# Altium PCB BackPlane4.PcbDoc
Units mm, origin at the board's own origin, x right, y up, seen from the top; angles counter-clockwise.
Board outline 120 x 130 mm, 4 copper layers (Top Layer, Internal Plane 1, Mid-Layer 1, Bottom Layer); 68 components, 80 nets, 548 pads, 0 vias.
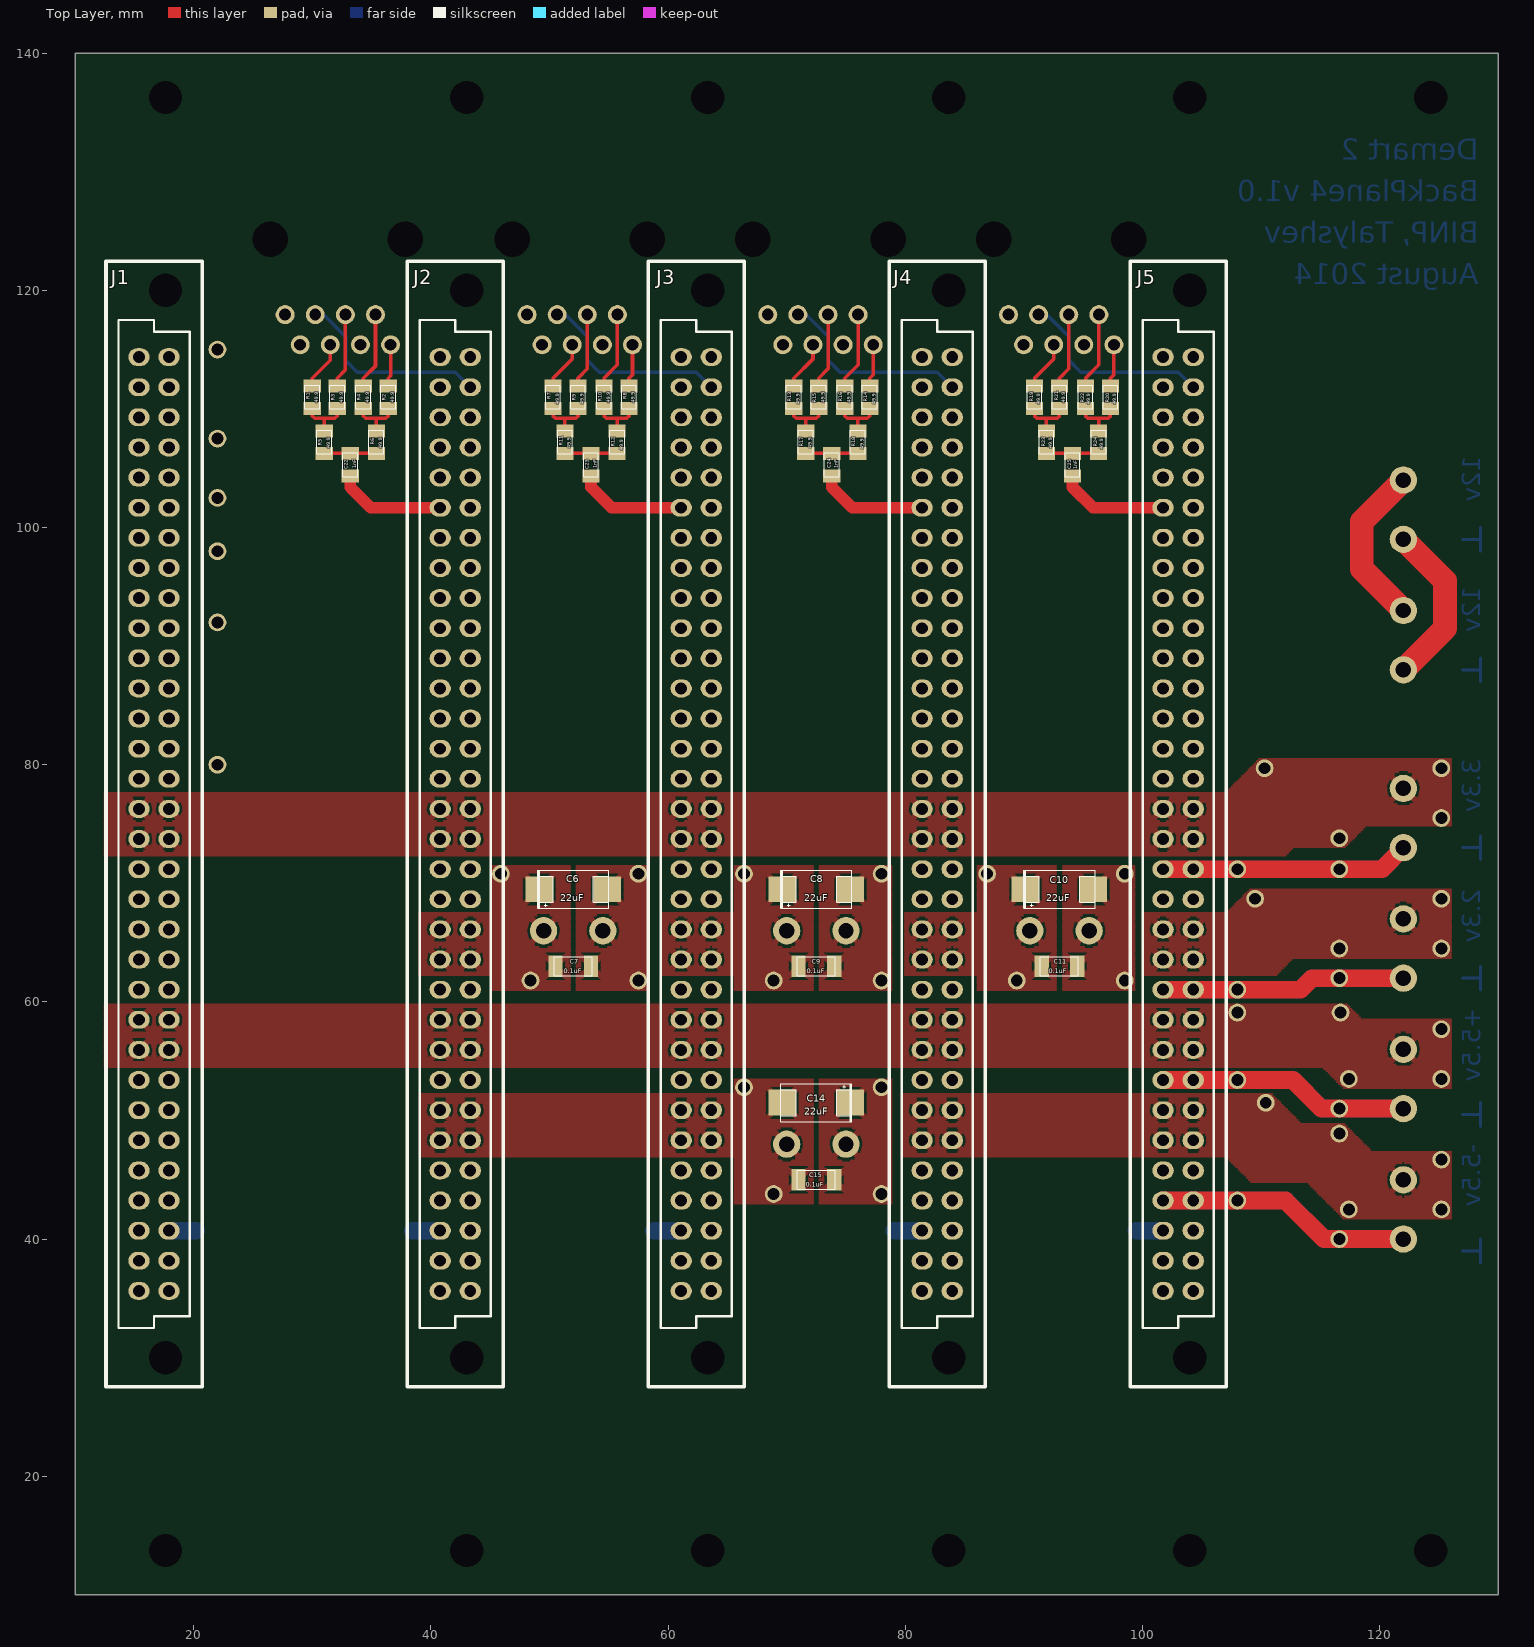
[diagram p0: Top Layer view]
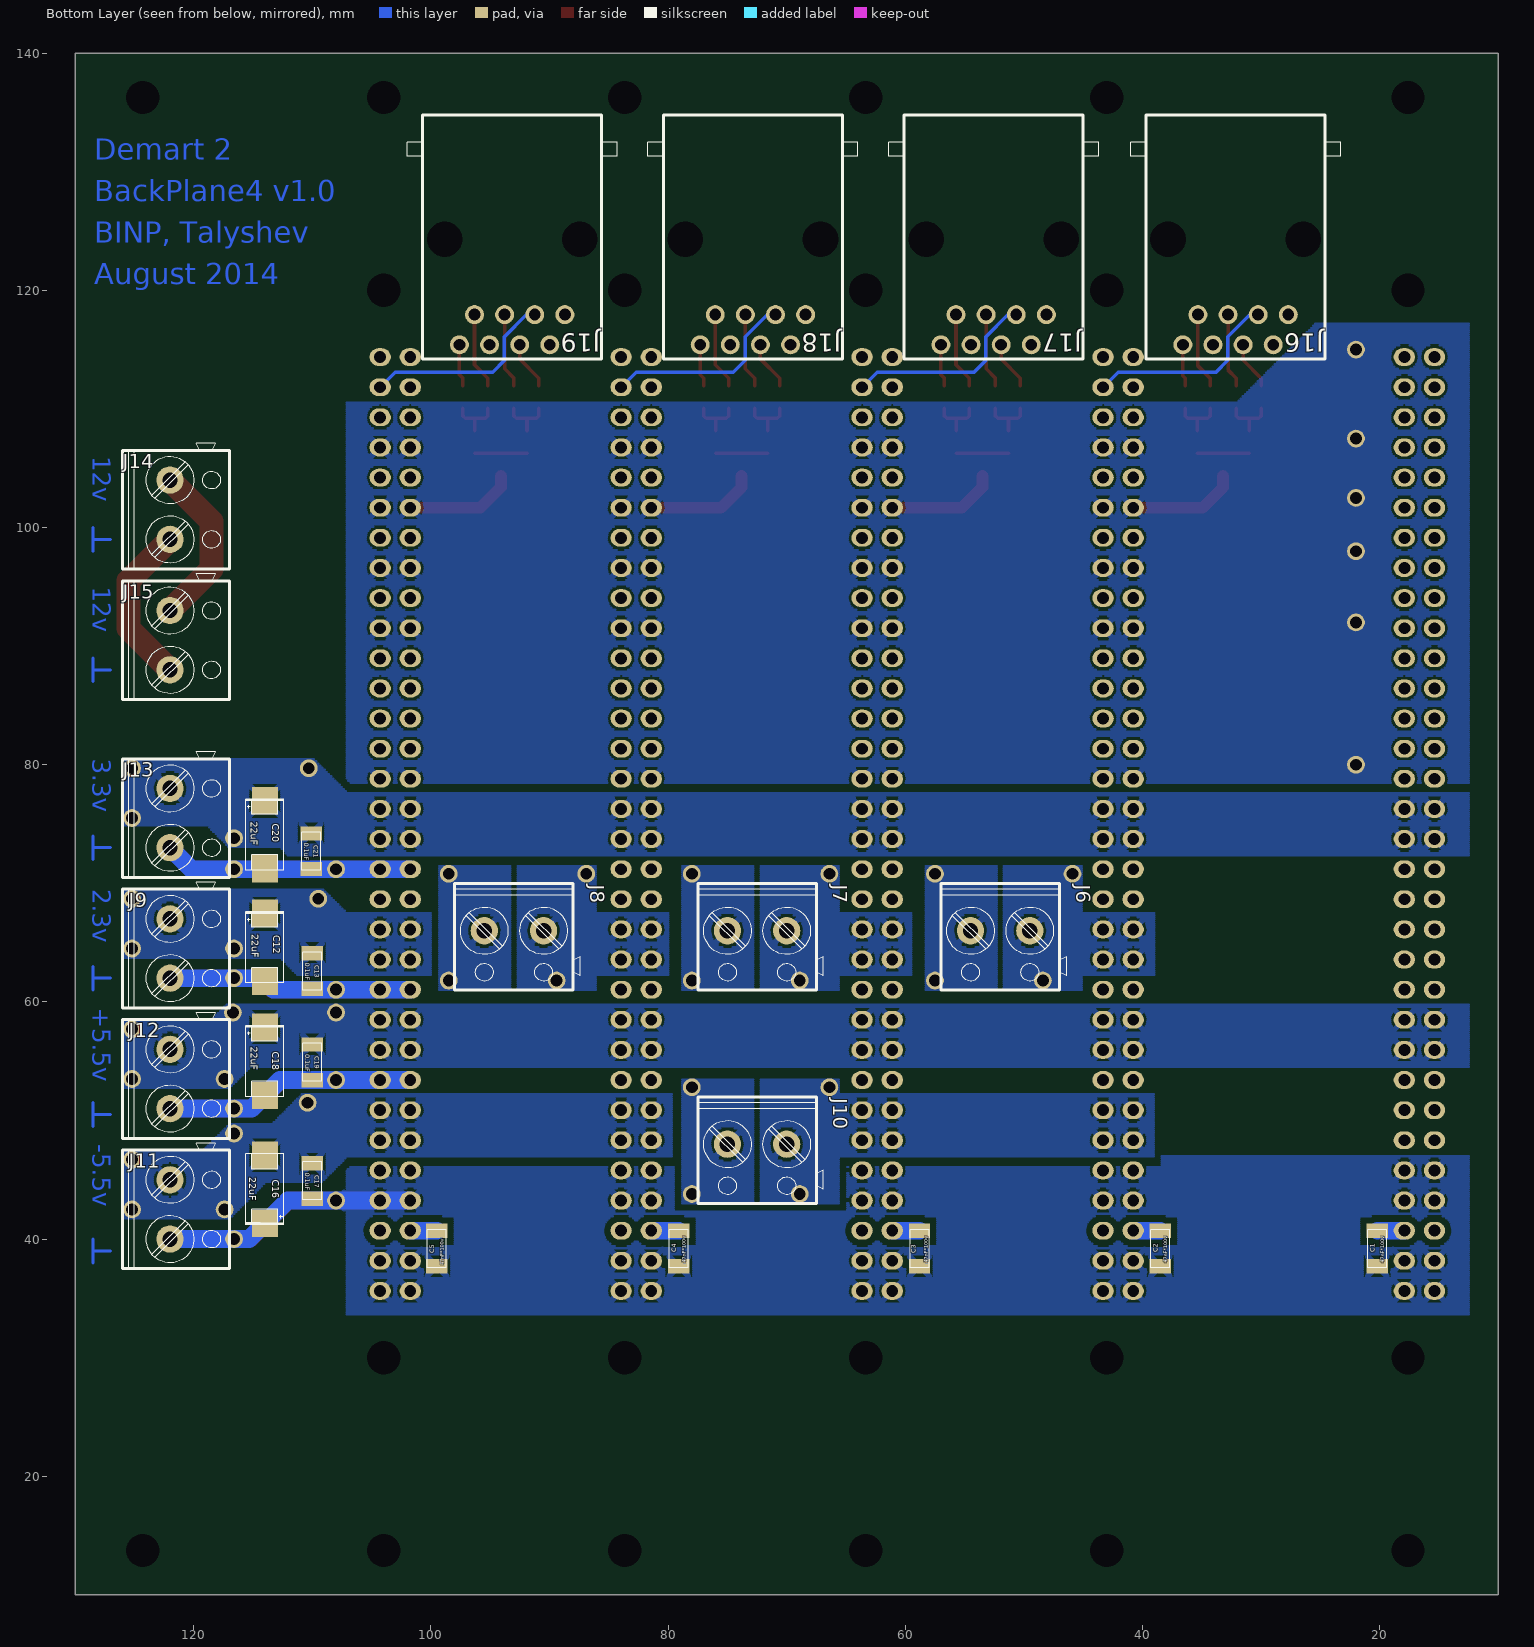
[diagram p1: Bottom Layer view, seen from below]
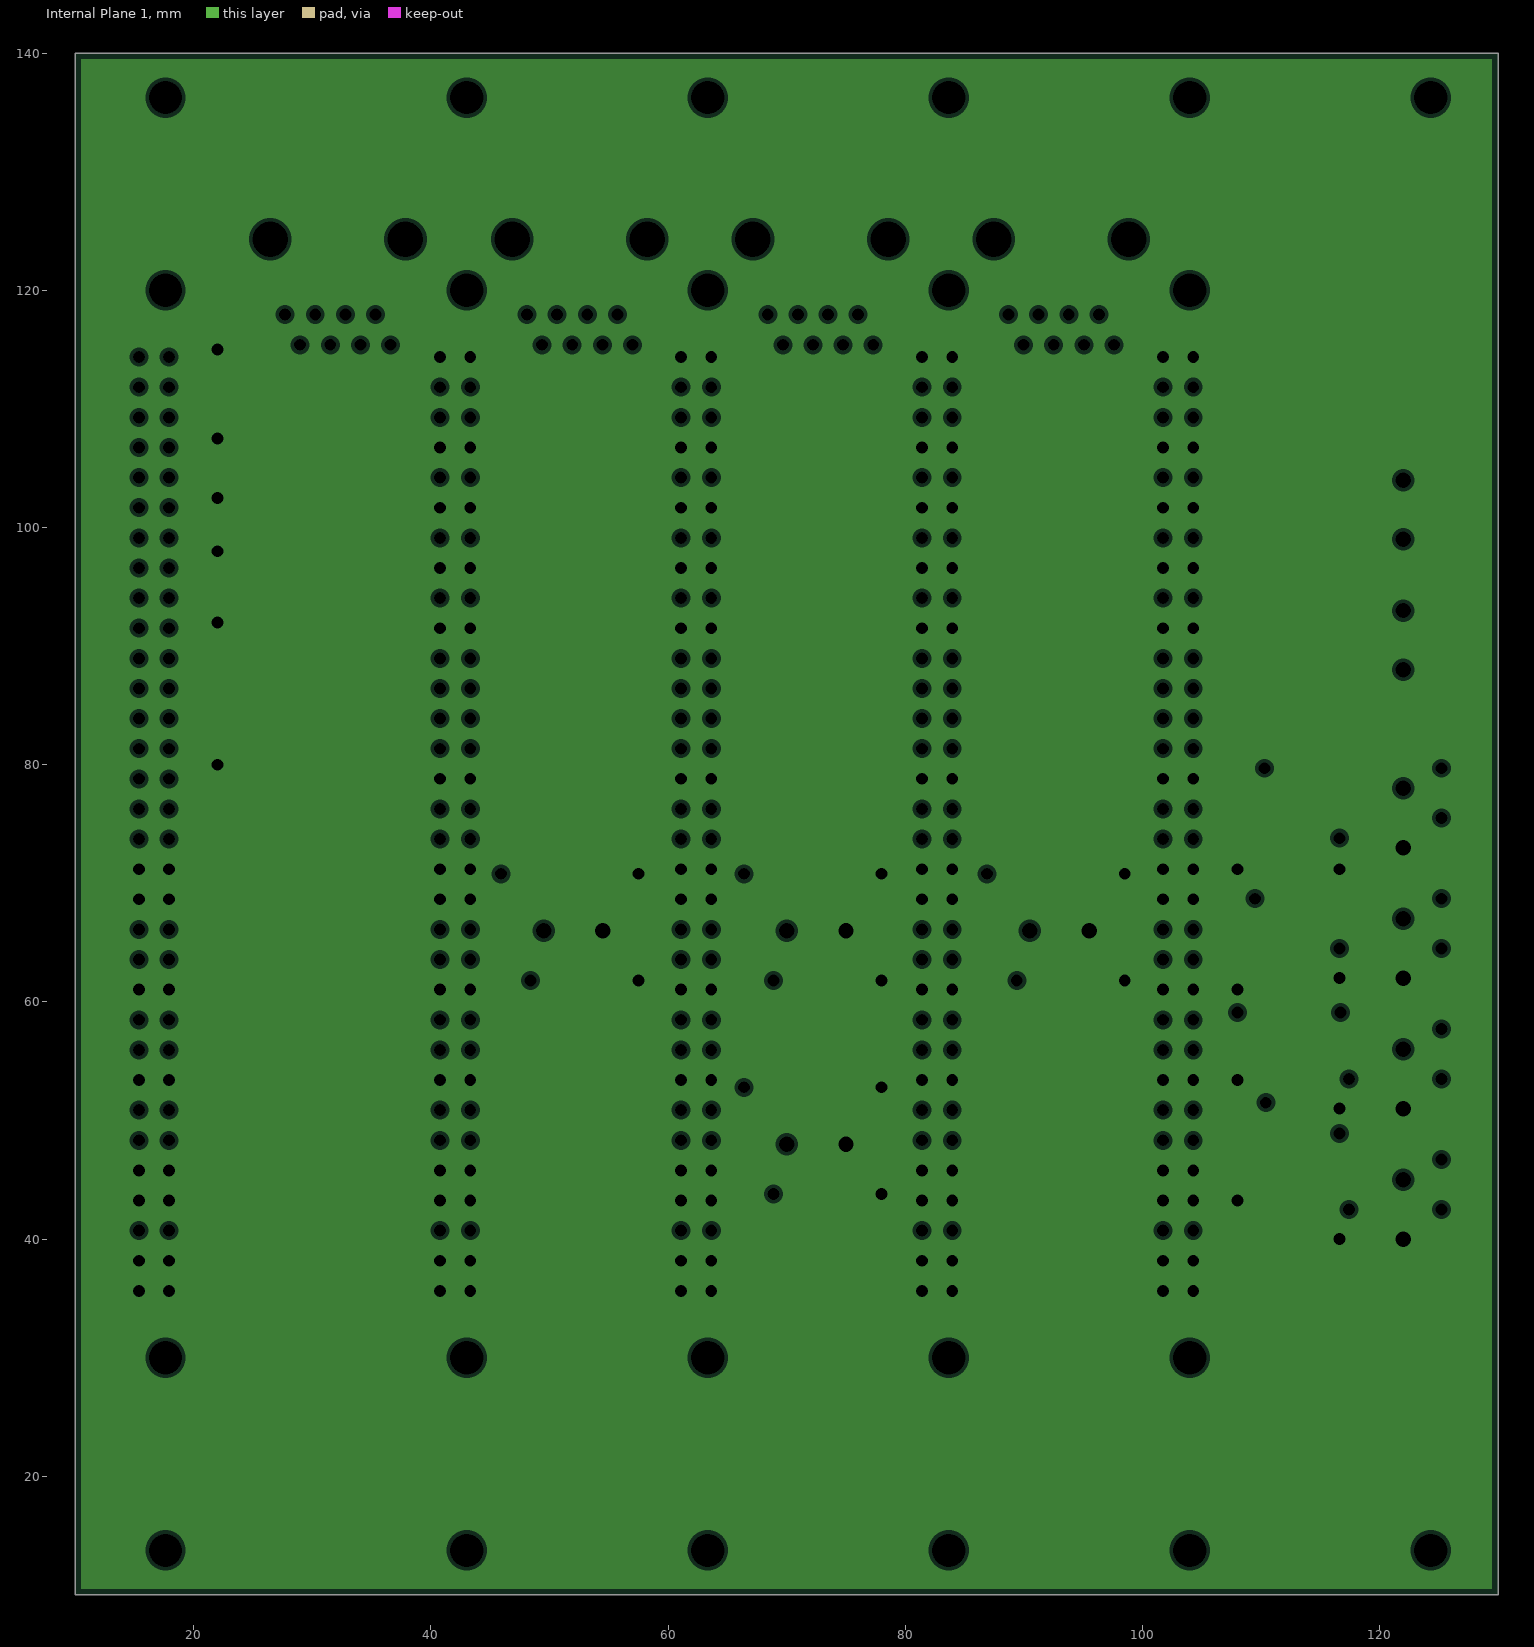
[diagram p2: Internal Plane 1, clearances drawn from the general rule]
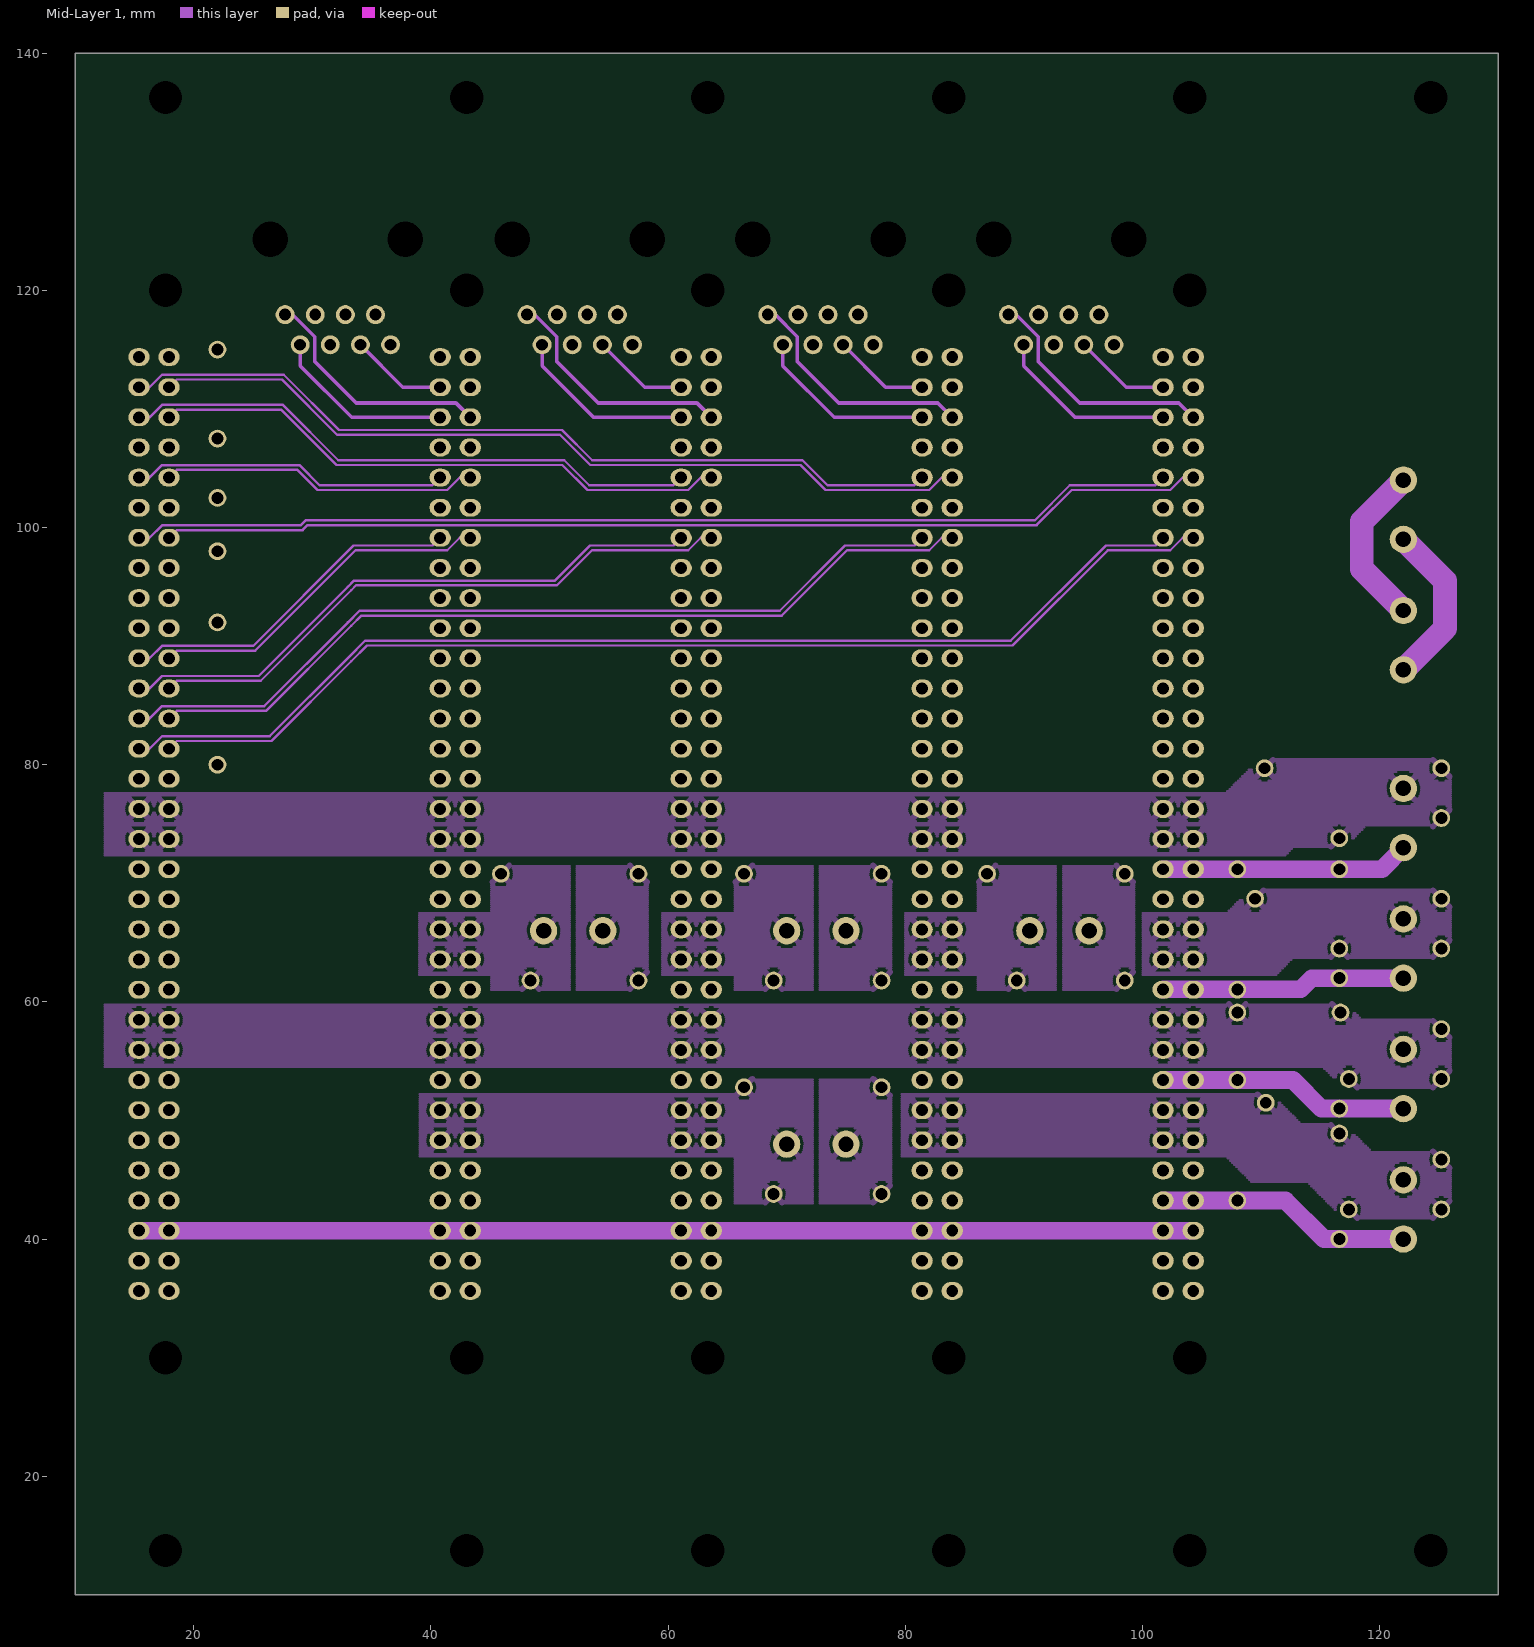
[diagram p3: Mid-Layer 1]

## Layer stack, top to bottom
Top Layer: signal copper 0.0356
Dielectric: core 0.32, FR-4, Dk 4.8
Internal Plane 1: plane copper 0.0356, net GND
Dielectric: prepreg 0.32, FR-4, Dk 4.8
Mid-Layer 1: signal copper 0.0356
Dielectric: core 0.32, FR-4, Dk 4.8
Bottom Layer: signal copper 0.0356

## Board outline
10,10 10,140 130,140 130,10 10,10

## Design rules (kind name [scope] priority, off if disabled: settings)
Clearance Clearance_HV [All vs (InNet('HV'))] p1: gap=0.5
Clearance Clearance_mid6_poly [(InPolygon AND OnLayer('Mid-Layer 6')) vs (OnLayer('Mid-Layer 6') OR OnLayer('Multi-Layer'))] p2: gap=0.25
Clearance Clearance_mid5_poly [(InPolygon AND OnLayer('Mid-Layer 5')) vs (OnLayer('Mid-Layer 5') OR OnLayer('Multi-Layer'))] p3: gap=0.25
Clearance Clearance_mid4_poly [(InPolygon AND OnLayer('Mid-Layer 4')) vs (OnLayer('Mid-Layer 4') OR OnLayer('Multi-Layer'))] p4: gap=0.25
Clearance Clearance_mid3_poly [(InPolygon AND OnLayer('Mid-Layer 3')) vs (OnLayer('Mid-Layer 3') OR OnLayer('Multi-Layer'))] p5: gap=0.25
Clearance Clearance_mid2_poly [(InPolygon AND OnLayer('Mid-Layer 2')) vs (OnLayer('Mid-Layer 2') OR OnLayer('Multi-Layer'))] p6: gap=0.25
Clearance Clearance_mid1_poly [(InPolygon AND OnLayer('Mid-Layer 1')) vs (OnLayer('Mid-Layer 1') OR OnLayer('Multi-Layer'))] p7: gap=0.25
Clearance Clearance_in2 [OnLayer('Internal Plane 2') vs (OnLayer('Internal Plane 2') OR OnLayer('Multi-Layer'))] p8: gap=0.2
Clearance Clearance_mid6 [OnLayer('Mid-Layer 6') vs (OnLayer('Mid-Layer 6') OR OnLayer('Multi-Layer'))] p9: gap=0.15
Clearance Clearance_mid5 [OnLayer('Mid-Layer 5') vs (OnLayer('Mid-Layer 5') OR OnLayer('Multi-Layer'))] p10: gap=0.15
Clearance Clearance_mid4 [OnLayer('Mid-Layer 4') vs (OnLayer('Mid-Layer 4') OR OnLayer('Multi-Layer'))] p11: gap=0.15
Clearance Clearance_bottom_poly [(InPolygon AND OnLayer('Bottom Layer')) vs (OnLayer('Bottom Layer') OR OnLayer('Multi-Layer'))] p12: gap=0.2
Clearance Clearance_top_poly [(InPolygon AND OnLayer('Top Layer')) vs (OnLayer('Top Layer') OR OnLayer('Multi-Layer'))] p13: gap=0.2
Clearance Clearance_int1 [OnLayer('Internal Plane 1') vs (OnLayer('Internal Plane 1') OR OnLayer('Multi-Layer'))] p14: gap=0.2
Clearance Clearance_bot [OnLayer('Bottom Layer') vs (OnLayer('Bottom Layer') OR OnLayer('Multi-Layer'))] p15: gap=0.15
Clearance Clearance_mid3 [OnLayer('Mid-Layer 3') vs (OnLayer('Mid-Layer 3') OR OnLayer('Multi-Layer'))] p16: gap=0.15
Clearance Clearance_mid2 [OnLayer('Mid-Layer 2') vs (OnLayer('Mid-Layer 2') OR OnLayer('Multi-Layer'))] p17: gap=0.15
Clearance Clearance_mid1 [OnLayer('Mid-Layer 1') vs (OnLayer('Mid-Layer 1') OR OnLayer('Multi-Layer'))] p18: gap=0.15
Clearance Clearance_top [OnLayer('Top Layer') vs (OnLayer('Top Layer') OR OnLayer('Multi-Layer'))] p19: gap=0.15
DiffPairsRouting [All] p1: maxlimit=0.2 minlimit=0.2 mostfreqgap=0.2 maxuncoupledlength=12.7
HoleSize [All] p1: absolutevalues=TRUE maxlimit=4 minlimit=0.025 maxpercent=80.000 minpercent=20.000
MinimumSolderMaskSliver [All] p1: minsoldermaskwidth=0.178
PlaneClearance [All] p1: clearance=0.3
PlaneConnect [All] p1: planeconnectstyle=Relief reliefexpansion=0.3 reliefentries=4 reliefconductorwidth=0.5 reliefairgap=0.3
PolygonConnect [All] p1: connectstyle=Relief reliefconductorwidth=0.5 reliefentries=4 polygonreliefangle="45 Angle"
RoomDefinition BackPlane4 [InComponentClass('BackPlane4')] p1: confinementstyle=ConfineOut formatcopy=TRUE lockcomponents=FALSE outline 132.5,10 182.5,10 182.5,22.5 132.5,22.5
RoutingVias [All] p1: holewidth=0.3 width=0.6 viastyle="Through Hole" minholewidth=0.25 minwidth=0.5 maxholewidth=4 maxwidth=6
SilkToSilkClearance [All] p1: silktosilkclearance=0.025
SilkscreenOverComponentPads [All] p1: minsilkscreentomaskgap=0.102
SolderMaskExpansion [All] p1: expansion=0.075
Width [All] p1: maxlimit=10 minlimit=0.15 preferedwidth=0.2
21 further rules are at their usual default settings.

## Classes and differential pairs
net class "HV Class": HV
differential pair HIT0: +HIT0_P -HIT0_N
differential pair HIT1: +HIT1_P -HIT1_N
differential pair HIT2: +HIT2_P -HIT2_N
differential pair HIT3: +HIT3_P -HIT3_N
differential pair STROBE0: +STROBE0_P -STROBE0_N
differential pair STROBE1: +STROBE1_P -STROBE1_N
differential pair STROBE2: +STROBE2_P -STROBE2_N
differential pair STROBE3: +STROBE3_P -STROBE3_N

## Components (designator, comment, footprint, x,y, rotation, side; value= is the part's Value field where it differs from the comment)
C1 "47nF*100v" 1206 20.2,39.2 r90 bottom
C2 "47nF*100v" 1206 38.5,39.2 r90 bottom
C3 "47nF*100v" 1206 58.8,39.2 r90 bottom
C4 "47nF*100v" 1206 79.1,39.2 r90 bottom
C5 "47nF*100v" 1206 99.5,39.2 r90 bottom
C6 "22uF" CP6032 52,69.5 r0 top
C7 "0.1uF" 1206 52,63 r180 top
C8 "22uF" CP6032 72.5,69.5 r0 top
C9 "0.1uF" 1206 72.5,63 r180 top
C10 "22uF" CP6032 93,69.5 r0 top
C11 "0.1uF" 1206 93,63 r180 top
C12 "22uF" CP6032 114,64.6 r270 bottom
C13 "0.1uF" 1206 110,62.6 r90 bottom
C14 "22uF" CP6032 72.5,51.5 r180 top
C15 "0.1uF" 1206 72.5,45 r180 top
C16 "22uF" CP6032 114,44.2 r90 bottom
C17 "0.1uF" 1206 110,44.9 r90 bottom
C18 "22uF" CP6032 114,55 r270 bottom
C19 "0.1uF" 1206 110,54.9 r90 bottom
C20 "22uF" CP6032 114,74.1 r270 bottom
C21 "0.1uF" 1206 110.1,72.7 r90 bottom
C22 "1nF" 0805 33.2,105.3 r90 top
C23 "1nF" 0805 53.5,105.3 r90 top
C24 "1nF" 0805 73.8,105.3 r90 top
C25 "1nF" 0805 94.1,105.3 r90 top
J1 "DIN41612-B-F" DIN41612-B-F 15.38,114.37 r0 top
J2 "DIN41612-B-F" DIN41612-B-F 40.78,114.37 r0 top
J3 "DIN41612-B-F" DIN41612-B-F 61.1,114.37 r0 top
J4 "DIN41612-B-F" DIN41612-B-F 81.42,114.37 r0 top
J5 "DIN41612-B-F" DIN41612-B-F 101.74,114.37 r0 top
J6 "DG300-5-02" DG300-5-02 49.5,66 r270 bottom
J7 "DG300-5-02" DG300-5-02 70,66 r270 bottom
J8 "DG300-5-02" DG300-5-02 90.5,66 r270 bottom
J9 "DG300-5-02" DG300-5-02 122,67 r180 bottom
J10 "DG300-5-02" DG300-5-02 70,48 r270 bottom
J11 "DG300-5-02" DG300-5-02 122,45 r180 bottom
J12 "DG300-5-02" DG300-5-02 122,56 r180 bottom
J13 "DG300-5-02" DG300-5-02 122,78 r180 bottom
J14 "DG300-5-02" DG300-5-02 122,104 r180 bottom
J15 "DG300-5-02" DG300-5-02 122,93 r180 bottom
J16 "Ethernet" TJ2-8P8C 24.6,134.8 r0 bottom
J17 "Ethernet" TJ2-8P8C 45,134.8 r0 bottom
J18 "Ethernet" TJ2-8P8C 65.3,134.8 r0 bottom
J19 "Ethernet" TJ2-8P8C 85.6,134.8 r0 bottom
R1 "49.9" 0805 30,111 r270 top
R2 "49.9" 0805 36.4,111 r270 top
R3 "49.9" 0805 32.1,111 r270 top
R4 "49.9" 0805 34.3,111 r270 top
R5 "49.9" 0805 31,107.2 r270 top
R6 "49.9" 0805 35.4,107.2 r270 top
R7 "49.9" 0805 50.3,111 r270 top
R8 "49.9" 0805 56.7,111 r270 top
R9 "49.9" 0805 52.4,111 r270 top
R10 "49.9" 0805 54.6,111 r270 top
R11 "49.9" 0805 51.3,107.2 r270 top
R12 "49.9" 0805 55.7,107.2 r270 top
R13 "49.9" 0805 70.6,111 r270 top
R14 "49.9" 0805 77,111 r270 top
R15 "49.9" 0805 72.7,111 r270 top
R16 "49.9" 0805 74.9,111 r270 top
R17 "49.9" 0805 71.6,107.2 r270 top
R18 "49.9" 0805 76,107.2 r270 top
R19 "49.9" 0805 90.9,111 r270 top
R20 "49.9" 0805 97.3,111 r270 top
R21 "49.9" 0805 93,111 r270 top
R22 "49.9" 0805 95.2,111 r270 top
R23 "49.9" 0805 91.9,107.2 r270 top
R24 "49.9" 0805 96.3,107.2 r270 top

## Footprints (in the part's own frame and the unit in brackets; to place one, negate y for a bottom-side part, rotate by r counter-clockwise, add the part's x,y. Pads: shape width x height; smd on the part's side, far side on the other; paste and mask are expansions set on the pad)
0805 [mm]
  rect 1.1x1.45 smd: 1(-0.95,0) 2(0.95,0)
  silkscreen extent -1,-0.63 1,0.63, body extent -1,-0.62 1,0.62, height 0.5
1206 [mm]
  rect 1.2x1.8 smd: 1(-1.5,0) 2(1.5,0)
  silkscreen extent -1.6,-0.8 1.6,0.8, body extent -1.6,-0.8 1.6,0.8, height 0.6
CP6032 [mil]
  rect 91x86 smd: +(-113,0) -(113,0)
  silkscreen extent -118,-63 118,63, body extent -119,-64 119,64, height 100
DG300-5-02 [mm] "5 mm gap clip"
  round 2.3 hole 1.3: 1(0,0) 2(0,-5)
  silkscreen extent -4,-7.5 5,3.1, body extent -4,-7.5 5,2.5, height 12.5
DIN41612-B-F [mm]
  round 0 hole 2.8: 0(2.24,5.63) 1(2.24,-84.37)
  oval 1.8x1.5 hole 1: A1(0,0) A2(0,-2.54) A3(0,-5.08) A4(0,-7.62) A5(0,-10.16) A6(0,-12.7) A7(0,-15.24) A8(0,-17.78) A9(0,-20.32) A10(0,-22.86) A11(0,-25.4) A12(0,-27.94) A13(0,-30.48) A14(0,-33.02) A15(0,-35.56) A16(0,-38.1) A17(0,-40.64) A18(0,-43.18) A19(0,-45.72) A20(0,-48.26) A21(0,-50.8) A22(0,-53.34) A23(0,-55.88) A24(0,-58.42) A25(0,-60.96) A26(0,-63.5) A27(0,-66.04) A28(0,-68.58) A29(0,-71.12) A30(0,-73.66) A31(0,-76.2) A32(0,-78.74) B1(2.54,0) B2(2.54,-2.54) B3(2.54,-5.08) B4(2.54,-7.62) B5(2.54,-10.16) B6(2.54,-12.7) B7(2.54,-15.24) B8(2.54,-17.78) B9(2.54,-20.32) B10(2.54,-22.86) B11(2.54,-25.4) B12(2.54,-27.94) B13(2.54,-30.48) B14(2.54,-33.02) B15(2.54,-35.56) B16(2.54,-38.1) B17(2.54,-40.64) B18(2.54,-43.18) B19(2.54,-45.72) B20(2.54,-48.26) B21(2.54,-50.8) B22(2.54,-53.34) B23(2.54,-55.88) B24(2.54,-58.42) B25(2.54,-60.96) B26(2.54,-63.5) B27(2.54,-66.04) B28(2.54,-68.58) B29(2.54,-71.12) B30(2.54,-73.66) B31(2.54,-76.2) B32(2.54,-78.74)
  silkscreen extent -2.78,-86.82 5.32,8.08, body extent -2.78,-86.82 5.32,8.08, height 11.6
TJ2-8P8C [mm]
  round 0 hole 3: 0(1.85,10.5) 0(13.25,10.5)
  round 1.6 hole 1: 1(3.105,16.85) 2(4.375,19.39) 3(5.645,16.85) 4(6.915,19.39) 5(8.185,16.85) 6(9.455,19.39) 7(10.725,16.85) 8(11.995,19.39)
  silkscreen extent -1.3,0 16.4,20.6, body extent 0,0 15.1,20.6, height 16

## Part data
C1 C2 C3 C4 C5 C7 C9 C11 C13 C15 C17 C19 C21: library part C
C6 C8 C10 C12 C14 C16 C18 C20: library part "C POL"
C22 C23 C24 C25: library part Cap, "Capacitor"
J16 J17 J18 J19: library part RJ-45, "Connector"
R1 R2 R3 R4 R5 R6 R7 R8 R9 R10 R11 R12 R13 R14 R15 R16 R17 R18 R19 R20 R21 R22 R23 R24: library part Res2, "Resistor"

## Free pads (board coordinates)
  round 0 hole 2.8: 0(17.62,13.75) 0(17.62,136.25) 1(43.02,13.75) 1(43.02,136.25) 2(63.34,13.75) 2(63.34,136.25) 3(83.66,13.75) 3(83.66,136.25) 4(103.98,13.75) 4(103.98,136.25) 4(124.3,13.75) 4(124.3,136.25)
  round 1.5 hole 1: 0(57.5,61.8) 0(57.5,70.8) 0(78,43.8) 0(78,52.8) 0(78,61.8) 0(78,70.8) 0(98.5,61.8) 0(98.5,70.8) 0(108,43.25) 0(108,53.41) 0(108,61.03) 0(108,71.19) 0(108,59.1) 0(109.5,68.7) 0(110.3,79.7) 0(110.4,51.5) 0(116.6,73.8) 0(116.6,40) 0(116.6,48.9) 0(116.6,51) 0(116.6,62) 0(116.6,64.5) 0(116.6,71.19) 0(116.7,59.1) 0(117.4,42.5) 0(117.4,53.5) 0(125.2,46.7) 0(125.2,68.7) 0(125.2,42.5) 0(125.2,53.5) 0(125.2,57.7) 0(125.2,64.5) 0(125.2,75.5) 0(125.2,79.7) 1(45.9,70.8) 1(66.4,52.8) 1(66.4,70.8) 1(86.9,70.8) 2(22,80) 2(22,92) 2(22,98) 2(22,102.5) 2(22,107.5) 2(22,115) 2(48.4,61.8) 2(68.9,43.8) 2(68.9,61.8) 2(89.4,61.8)

## Nets (pads, with @x,y where several pads share a name; then routed paths per layer and width w, separated by ;. In a path a pad name is that pad's centre, name@x,y a point inside that pad or via, vN(x,y) a via of type N, cw(c..) or ccw(c..) an arc to the next point about the centre after c; other vN are vias at no path point)
+2.3V1: C6.+ C7.2 J2.A20 J2.A21 J2.B20 J2.B21 J6.1 pad.1@45.9,70.8 pad.2@48.4,61.8
+2.3V2: C8.+ C9.2 J3.A20 J3.A21 J3.B20 J3.B21 J7.1 pad.1@66.4,70.8 pad.2@68.9,61.8
+2.3V3: C10.+ C11.2 J4.A20 J4.A21 J4.B20 J4.B21 J8.1 pad.1@86.9,70.8 pad.2@89.4,61.8
+2.3V4: C12.+ C13.2 J5.A20 J5.A21 J5.B20 J5.B21 J9.1 pad.0@109.5,68.7 pad.0@116.6,64.5 pad.0@125.2,64.5 pad.0@125.2,68.7
+3.3V: C20.+ C21.2 J1.A16 J1.A17 J1.B16 J1.B17 J2.A16 J2.A17 J2.B16 J2.B17 J3.A16 J3.A17 J3.B16 J3.B17 J4.A16 J4.A17 J4.B16 J4.B17 J5.A16 J5.A17 J5.B16 J5.B17 J13.1 pad.0@110.3,79.7 pad.0@116.6,73.8 pad.0@125.2,75.5 pad.0@125.2,79.7
+5.5V: C18.+ C19.2 J1.A23 J1.A24 J1.B23 J1.B24 J2.A23 J2.A24 J2.B23 J2.B24 J3.A23 J3.A24 J3.B23 J3.B24 J4.A23 J4.A24 J4.B23 J4.B24 J5.A23 J5.A24 J5.B23 J5.B24 J12.1 pad.0@108,59.1 pad.0@116.7,59.1 pad.0@117.4,53.5 pad.0@125.2,53.5 pad.0@125.2,57.7
+12V_FAN: J14.1 J15.1 | length 27.8
  Top Layer w2: J15.1 118.5,96.5 118.5,100.5 J14.1
  Mid-Layer 1 w2: J15.1 118.5,96.5 118.5,100.5 J14.1
-5.5V1: C14.- C15.2 J2.A26 J2.A27 J2.B26 J2.B27 J3.A26 J3.A27 J3.B26 J3.B27 J10.1 pad.1@66.4,52.8 pad.2@68.9,43.8
-5.5V2: C16.- C17.2 J4.A26 J4.A27 J4.B26 J4.B27 J5.A26 J5.A27 J5.B26 J5.B27 J11.1 pad.0@110.4,51.5 pad.0@116.6,48.9 pad.0@117.4,42.5 pad.0@125.2,42.5 pad.0@125.2,46.7
ETH0_1: J2.B3 J16.1 | length 20.4
  Mid-Layer 1 w0.3: J16.1 28.35,117.95 30.2,116.1 30.2,114 33.7,110.5 42.11,110.5 J2.B3
ETH0_2: J2.A3 J16.2 | length 15.4
  Mid-Layer 1 w0.3: J16.2 28.975,113.625 33.31,109.29 J2.A3
ETH0_3: J2.B2 J16.3 | length 16.8
  Bottom Layer w0.3: J16.3 30.95,117.95 32.8,116.1 32.8,114.1 33.8,113.1 42.05,113.1 J2.B2
ETH0_6: J2.A2 J16.6 | length 8.2
  Mid-Layer 1 w0.3: J16.6 37.635,111.83 J2.A2
ETH1_1: J3.B3 J17.1 | length 20.4
  Mid-Layer 1 w0.3: J17.1 48.75,117.95 50.6,116.1 50.6,114 54.1,110.5 62.43,110.5 J3.B3
ETH1_2: J3.A3 J17.2 | length 15.3
  Mid-Layer 1 w0.3: J17.2 49.375,113.625 53.71,109.29 J3.A3
ETH1_3: J3.B2 J17.3 | length 16.7
  Bottom Layer w0.3: J17.3 51.35,117.95 53.2,116.1 53.2,114.1 54.2,113.1 62.37,113.1 J3.B2
ETH1_6: J3.A2 J17.6 | length 8.1
  Mid-Layer 1 w0.3: J17.6 58.035,111.83 J3.A2
ETH2_1: J4.B3 J18.1 | length 20.4
  Mid-Layer 1 w0.3: J18.1 69.05,117.95 70.9,116.1 70.9,114 74.4,110.5 82.75,110.5 J4.B3
ETH2_2: J4.A3 J18.2 | length 15.3
  Mid-Layer 1 w0.3: J18.2 69.675,113.625 74.01,109.29 J4.A3
ETH2_3: J4.B2 J18.3 | length 16.7
  Bottom Layer w0.3: J18.3 71.65,117.95 73.5,116.1 73.5,114.1 74.5,113.1 82.69,113.1 J4.B2
ETH2_6: J4.A2 J18.6 | length 8.1
  Mid-Layer 1 w0.3: J18.6 78.335,111.83 J4.A2
ETH3_1: J5.B3 J19.1 | length 20.4
  Mid-Layer 1 w0.3: J19.1 89.35,117.95 91.2,116.1 91.2,114 94.7,110.5 103.07,110.5 J5.B3
ETH3_2: J5.A3 J19.2 | length 15.3
  Mid-Layer 1 w0.3: J19.2 89.975,113.625 94.31,109.29 J5.A3
ETH3_3: J5.B2 J19.3 | length 16.7
  Bottom Layer w0.3: J19.3 91.95,117.95 93.8,116.1 93.8,114.1 94.8,113.1 103.01,113.1 J5.B2
ETH3_6: J5.A2 J19.6 | length 8.2
  Mid-Layer 1 w0.3: J19.6 98.635,111.83 J5.A2
GND: C1.1 C2.1 C3.1 C4.1 C5.1 C6.- C7.1 C8.- C9.1 C10.- C11.1 C12.- C13.1 C14.+ C15.1 C16.+ C17.1 C18.- C19.1 C20.- C21.1 C22.1 C23.1 C24.1 C25.1 J1.A18 J1.A19 J1.A22 J1.A25 J1.A28 J1.A29 J1.A31 J1.A32 J1.B18 J1.B19 J1.B22 J1.B25 J1.B28 J1.B29 J1.B31 J1.B32 J2.A1 J2.A4 J2.A6 J2.A8 J2.A10 J2.A15 J2.A18 J2.A19 J2.A22 J2.A25 J2.A28 J2.A29 J2.A31 J2.A32 J2.B1 J2.B4 J2.B6 J2.B8 J2.B10 J2.B15 J2.B18 J2.B19 J2.B22 J2.B25 J2.B28 J2.B29 J2.B31 J2.B32 J3.A1 J3.A4 J3.A6 J3.A8 J3.A10 J3.A15 J3.A18 J3.A19 J3.A22 J3.A25 J3.A28 J3.A29 J3.A31 J3.A32 J3.B1 J3.B4 J3.B6 J3.B8 J3.B10 J3.B15 J3.B18 J3.B19 J3.B22 J3.B25 J3.B28 J3.B29 J3.B31 J3.B32 J4.A1 J4.A4 J4.A6 J4.A8 J4.A10 J4.A15 J4.A18 J4.A19 J4.A22 J4.A25 J4.A28 J4.A29 J4.A31 J4.A32 J4.B1 J4.B4 J4.B6 J4.B8 J4.B10 J4.B15 J4.B18 J4.B19 J4.B22 J4.B25 J4.B28 J4.B29 J4.B31 J4.B32 J5.A1 J5.A4 J5.A6 J5.A8 J5.A10 J5.A15 J5.A18 J5.A19 J5.A22 J5.A25 J5.A28 J5.A29 J5.A31 J5.A32 J5.B1 J5.B4 J5.B6 J5.B8 J5.B10 J5.B15 J5.B18 J5.B19 J5.B22 J5.B25 J5.B28 J5.B29 J5.B31 J5.B32 J6.2 J7.2 J8.2 J9.2 J10.2 J11.2 J12.2 J13.2 pad.0@57.5,61.8 pad.0@57.5,70.8 pad.0@78,43.8 pad.0@78,52.8 pad.0@78,61.8 pad.0@78,70.8 pad.0@98.5,61.8 pad.0@98.5,70.8 pad.0@108,43.25 pad.0@108,53.41 pad.0@108,61.03 pad.0@108,71.19 pad.0@116.6,40 pad.0@116.6,51 pad.0@116.6,62 pad.0@116.6,71.19 pad.2@22,80 pad.2@22,92 pad.2@22,98 pad.2@22,102.5 pad.2@22,107.5 pad.2@22,115 | length 291.1
  Top Layer w1: C22.1 33.2,103.4 34.93,101.67 J2.A6 ; C23.1 53.5,103.4 55.23,101.67 J3.A6 ; C24.1 73.8,103.4 75.53,101.67 J4.A6 ; C25.1 94.1,103.4 95.83,101.67 J5.A6
  Top Layer w1.5: J5.A29 J5.B29 112.05,43.25 115.3,40 J11.2 ; J5.A25 J5.B25 112.69,53.41 115.1,51 J12.2 ; J5.A22 J5.B22 113.33,61.03 114.3,62 ; J5.A18 J5.B18 120.19,71.19 J13.2 ; 114,61.7 114.3,62 ; J9.2 114.3,62
  Mid-Layer 1 w1.5: J5.A29 J5.B29 108,43.25 112.05,43.25 115.3,40 116.6,40 J11.2 ; J5.A25 J5.B25 108,53.41 112.69,53.41 115.1,51 116.6,51 J12.2 ; J5.A22 101.767,61.057 108,61.057 113.337,61.057 114.28,62 116.6,62 J9.2 ; J5.A18 J5.B18 108,71.19 116.6,71.19 120.19,71.19 J13.2
  Bottom Layer w1.5: J5.A29 J5.B29 112.08,43.25 C16.+ 115.33,40 J11.2 ; J5.A25 J5.B25 112.72,53.41 115.13,51 J12.2 ; J5.A22 J5.B22 113.3,61.03 C12.- 114.27,62 J9.2 ; J5.A18 J5.B18 120.19,71.19 J13.2
GND_FAN: J14.2 J15.2 | length 27.8
  Top Layer w2: J15.2 125.5,91.5 125.5,95.5 J14.2
  Mid-Layer 1 w2: J15.2 125.5,91.5 125.5,95.5 J14.2
HIT0_N: J1.A11 J2.A7 | length 29.6
  Mid-Layer 1 w0.2: J1.A11 16.27,88.97 17.32,90.02 25.02,90.02 33.48,98.48 39.78,98.48 40.13,98.48 J2.A7
HIT0_P: J1.B11 J2.B7 | length 29.6
  Mid-Layer 1 w0.2: J1.B11 18.57,89.62 18.92,89.62 25.186,89.62 33.646,98.08 39.78,98.08 41.38,98.08 42.43,99.13 J2.B7
HIT1_N: J1.A12 J3.A7 | length 51
  Mid-Layer 1 w0.2: J1.A12 16.27,86.43 17.32,87.48 25.48,87.48 33,95 33.525,95.525 50.459,95.525 53.414,98.48 60.1,98.48 60.45,98.48 J3.A7
HIT1_P: J1.B12 J3.B7 | length 51
  Mid-Layer 1 w0.2: J1.B12 18.57,87.08 18.92,87.08 25.646,87.08 33.283,94.717 33.691,95.125 50.625,95.125 53.58,98.08 61.7,98.08 62.75,99.13 J3.B7
HIT2_N: J1.A13 J4.A7 | length 72.4
  Mid-Layer 1 w0.2: J1.A13 16.27,83.89 17.32,84.94 25.94,84.94 33,92 33.975,92.975 69.409,92.975 74.914,98.48 80.42,98.48 80.77,98.48 J4.A7
HIT2_P: J1.B13 J4.B7 | length 72.4
  Mid-Layer 1 w0.2: J1.B13 18.57,84.54 18.92,84.54 26.106,84.54 33.283,91.717 34.141,92.575 69.575,92.575 75.08,98.08 82.02,98.08 83.07,99.13 J4.B7
HIT3_N: J1.A14 J5.A7 | length 93.7
  Mid-Layer 1 w0.2: J1.A14 16.27,81.35 17.32,82.4 26.4,82.4 33,89 34.45,90.45 88.884,90.45 96.914,98.48 100.74,98.48 101.09,98.48 J5.A7
HIT3_P: J1.B14 J5.B7 | length 93.7
  Mid-Layer 1 w0.2: J1.B14 18.57,82 18.92,82 26.566,82 33.283,88.717 34.616,90.05 89.05,90.05 97.08,98.08 102.34,98.08 103.39,99.13 J5.B7
HV: C1.2 C2.2 C3.2 C4.2 C5.2 J1.A30 J1.B30 J2.A30 J2.B30 J3.A30 J3.B30 J4.A30 J4.B30 J5.A30 J5.B30 | length 100.3
  Mid-Layer 1 w1.5: J1.A30 J1.B30 36,40.71 J2.A30 J2.B30 J3.A30 J3.B30 J4.A30 J4.B30 J5.A30 J5.B30
  Bottom Layer w1.5: J1.B30 C1.2@20.19,40.71 ; C2.2 J2.A30@40.77,40.7 ; C3.2 J3.A30@61.09,40.7 ; C4.2 J4.A30@81.41,40.7 ; C5.2 J5.A30@101.73,40.7
NetC22_2: C22.2 R5.2 R6.2 | length 4.4
  Top Layer w0.3: R5.2 R6.2
NetC23_2: C23.2 R11.2 R12.2 | length 4.4
  Top Layer w0.3: R11.2 R12.2
NetC24_2: C24.2 R17.2 R18.2 | length 4.4
  Top Layer w0.3: R17.2 R18.2
NetC25_2: C25.2 R23.2 R24.2 | length 4.4
  Top Layer w0.3: R23.2 R24.2
NetJ16_4: J16.4 R1.1 | length 4.1
  Top Layer w0.3: R1.1 30,112.6 31.515,114.115 J16.4
NetJ16_5: J16.5 R3.1 | length 6.3
  Top Layer w0.3: R3.1 32.1,112.6 32.785,113.285 J16.5
NetJ16_7: J16.7 R4.1 | length 6.4
  Top Layer w0.3: R4.1 34.3,112.6 35.325,113.625 J16.7
NetJ16_8: J16.8 R2.1 | length 3.5
  Top Layer w0.3: R2.1 36.4,112.6 36.595,112.795 J16.8
NetJ17_4: J17.4 R7.1 | length 4.1
  Top Layer w0.3: R7.1 50.3,112.6 51.915,114.215 J17.4
NetJ17_5: J17.5 R9.1 | length 6.3
  Top Layer w0.3: R9.1 52.4,112.6 53.185,113.385 J17.5
NetJ17_7: J17.7 R10.1 | length 6.5
  Top Layer w0.3: R10.1 54.6,112.6 55.725,113.725 J17.7
NetJ17_8: J17.8 R8.1 | length 3.6
  Top Layer w0.3: R8.1 56.7,112.6 56.995,112.895 J17.8
NetJ18_4: J18.4 R13.1 | length 4.1
  Top Layer w0.3: R13.1 70.6,112.6 72.215,114.215 J18.4
NetJ18_5: J18.5 R15.1 | length 6.3
  Top Layer w0.3: R15.1 72.7,112.6 73.485,113.385 J18.5
NetJ18_7: J18.7 R16.1 | length 6.5
  Top Layer w0.3: R16.1 74.9,112.6 76.025,113.725 J18.7
NetJ18_8: J18.8 R14.1 | length 3.6
  Top Layer w0.3: R14.1 77,112.6 77.295,112.895 J18.8
NetJ19_4: J19.4 R19.1 | length 4.1
  Top Layer w0.3: R19.1 90.9,112.6 92.515,114.215 J19.4
NetJ19_5: J19.5 R21.1 | length 6.3
  Top Layer w0.3: R21.1 93,112.6 93.785,113.385 J19.5
NetJ19_7: J19.7 R22.1 | length 6.5
  Top Layer w0.3: R22.1 95.2,112.6 96.325,113.725 J19.7
NetJ19_8: J19.8 R20.1 | length 3.6
  Top Layer w0.3: R20.1 97.3,112.6 97.595,112.895 J19.8
NetR1_2: R1.2 R3.2 R5.1 | length 4.6
  Top Layer w0.3: R1.2 30,109.4 30.2,109.2 31,109.2 ; R5.1 31,109.2 ; R3.2 32.1,109.4 31.9,109.2 31,109.2
NetR2_2: R2.2 R4.2 R6.1 | length 4.6
  Top Layer w0.3: R4.2 34.3,109.4 34.5,109.2 35.4,109.2 ; R6.1 35.4,109.2 ; R2.2 36.4,109.4 36.2,109.2 35.4,109.2
NetR7_2: R7.2 R9.2 R11.1 | length 4.6
  Top Layer w0.3: R7.2 50.3,109.4 50.5,109.2 51.3,109.2 ; R11.1 51.3,109.2 ; R9.2 52.4,109.4 52.2,109.2 51.3,109.2
NetR8_2: R8.2 R10.2 R12.1 | length 4.6
  Top Layer w0.3: R10.2 54.6,109.4 54.8,109.2 55.7,109.2 ; R12.1 55.7,109.2 ; R8.2 56.7,109.4 56.5,109.2 55.7,109.2
NetR13_2: R13.2 R15.2 R17.1 | length 4.6
  Top Layer w0.3: R13.2 70.6,109.4 70.8,109.2 71.6,109.2 ; R17.1 71.6,109.2 ; R15.2 72.7,109.4 72.5,109.2 71.6,109.2
NetR14_2: R14.2 R16.2 R18.1 | length 4.6
  Top Layer w0.3: R16.2 74.9,109.4 75.1,109.2 76,109.2 ; R18.1 76,109.2 ; R14.2 77,109.4 76.8,109.2 76,109.2
NetR19_2: R19.2 R21.2 R23.1 | length 4.6
  Top Layer w0.3: R19.2 90.9,109.4 91.1,109.2 91.9,109.2 ; R23.1 91.9,109.2 ; R21.2 93,109.4 92.8,109.2 91.9,109.2
NetR20_2: R20.2 R22.2 R24.1 | length 4.6
  Top Layer w0.3: R22.2 95.2,109.4 95.4,109.2 96.3,109.2 ; R24.1 96.3,109.2 ; R20.2 97.3,109.4 97.1,109.2 96.3,109.2
RESERVED0_N: J2.A9
RESERVED0_P: J2.B9
RESERVED1_N: J3.A9
RESERVED1_P: J3.B9
RESERVED2_N: J4.A9
RESERVED2_P: J4.B9
RESERVED3_N: J5.A9
RESERVED3_P: J5.B9
STROBE0_N: J1.A5 J2.A5 | length 26.8
  Mid-Layer 1 w0.2: J1.A5 16.27,104.21 17.32,105.26 18.92,105.26 28.906,105.26 30.606,103.56 39.78,103.56 40.13,103.56 J2.A5
STROBE0_P: J1.B5 J2.B5 | length 26.8
  Mid-Layer 1 w0.2: J1.B5 18.57,104.86 28.74,104.86 30.44,103.16 39.78,103.16 41.38,103.16 42.43,104.21 J2.B5
STROBE1_N: J1.A3 J3.A5 | length 49.2
  Mid-Layer 1 w0.2: J1.A3 16.27,109.29 17.32,110.34 18.92,110.34 27.526,110.34 32.191,105.675 51.241,105.675 53.356,103.56 60.1,103.56 60.45,103.56 J3.A5
STROBE1_P: J1.B3 J3.B5 | length 49.2
  Mid-Layer 1 w0.2: J1.B3 18.57,109.94 27.36,109.94 32.025,105.275 51.075,105.275 53.19,103.16 60.1,103.16 61.7,103.16 62.75,104.21 J3.B5
STROBE2_N: J1.A2 J4.A5 | length 70.6
  Mid-Layer 1 w0.2: J1.A2 16.27,111.83 17.32,112.88 18.92,112.88 27.595,112.88 32.25,108.225 51.05,108.225 53.6,105.675 71.325,105.675 73.44,103.56 80.77,103.56 J4.A5
STROBE2_P: J1.B2 J4.B5 | length 70.6
  Mid-Layer 1 w0.2: J1.B2 18.57,112.48 18.92,112.48 27.429,112.48 32.084,107.825 50.884,107.825 53.434,105.275 71.159,105.275 73.274,103.16 80.42,103.16 82.02,103.16 83.07,104.21 J4.B5
STROBE3_N: J1.A7 J5.A5 | length 88.5
  Mid-Layer 1 w0.2: J1.A7 16.27,99.13 17.32,100.18 18.92,100.18 29.014,100.18 29.434,100.6 90.909,100.6 93.869,103.56 100.74,103.56 101.09,103.56 J5.A5
STROBE3_P: J1.B7 J5.B5 | length 88.5
  Mid-Layer 1 w0.2: J1.B7 18.57,99.78 18.92,99.78 29.18,99.78 29.6,100.2 91.075,100.2 94.035,103.16 102.34,103.16 103.39,104.21 J5.B5
pads on no net: J1.0 J1.1 J1.A1 J1.A4 J1.A6 J1.A8 J1.A9 J1.A10 J1.A15 J1.A20 J1.A21 J1.A26 J1.A27 J1.B1 J1.B4 J1.B6 J1.B8 J1.B9 J1.B10 J1.B15 J1.B20 J1.B21 J1.B26 J1.B27 J2.0 J2.1 J2.A11 J2.A12 J2.A13 J2.A14 J2.B11 J2.B12 J2.B13 J2.B14 J3.0 J3.1 J3.A11 J3.A12 J3.A13 J3.A14 J3.B11 J3.B12 J3.B13 J3.B14 J4.0 J4.1 J4.A11 J4.A12 J4.A13 J4.A14 J4.B11 J4.B12 J4.B13 J4.B14 J5.0 J5.1 J5.A11 J5.A12 J5.A13 J5.A14 J5.B11 J5.B12 J5.B13 J5.B14 J16.0 J17.0 J18.0 J19.0
copper on no net: | length 21
  Bottom Layer w0.25: 127,39 128.5,39 ; 127,50.5 128.5,50.5 ; 127,62 128.5,62 ; 127,73 128.5,73 ; 127,88 128.5,88 ; 127,99 128.5,99 ; 128.5,38 128.5,39 ; 128.5,40 128.5,39 ; 128.5,49.5 128.5,50.5 ; 128.5,51.5 128.5,50.5 ; 128.5,61 128.5,62 ; 128.5,63 128.5,62 ; 128.5,72 128.5,73 ; 128.5,74 128.5,73 ; 128.5,87 128.5,88 ; 128.5,89 128.5,88 ; 128.5,98 128.5,99 ; 128.5,100 128.5,99

## Polygon pours and split planes (outlines as drawn)
-5.5V2 on Top Layer "Top Layer-No Net 1" (hatched Horizontal grid 0.18 track 0.2, remove dead copper, pour order 1015): 107.1,52.3 110.8,52.3 110.9,52.2 113.4,49.7 114.8,49.7 117,49.7 119.1,47.6 119.2,47.5 119.6,47.5 126,47.5 126,41.7 117,41.7 114,44.7 112.5,44.7 109.3,44.7 109,45 107.1,46.9 107.1,52.3
+5.5V on Top Layer "Top Layer-No Net 1" (hatched Horizontal grid 0.18 track 0.2, remove dead copper, pour order 1014): 107.1,59.92 117.08,59.92 117.1,59.9 118.5,58.5 120.9,58.5 126,58.5 126,52.7 117,52.7 115.18,54.52 107.1,54.52 107.1,59.92
+2.3V4 on Top Layer "Top Layer-No Net 1" (hatched Horizontal grid 0.18 track 0.2, remove dead copper, pour order 1013): 126,63.7 112.7,63.7 111.2,62.2 100,62.2 100,67.5 107.1,67.5 109.1,69.5 126,69.5 126,63.7
+3.3V on Top Layer "Top Layer-No Net 1" (hatched Horizontal grid 0.18 track 0.2, remove dead copper, pour order 1012): 107.1,72.3 112,72.3 112.7,73 117,73 118.7,74.7 126,74.7 126,80.5 109.9,80.5 107.1,77.7 107.1,72.3
-5.5V1 on Top Layer "Top Layer-No Net 1" (hatched Horizontal grid 0.18 track 0.2, remove dead copper, pour order 1011): 65.6,53.6 72.2,53.6 72.2,43 65.6,43 65.6,53.6
GND on Top Layer "Top Layer-No Net 1" (hatched Horizontal grid 0.18 track 0.2, remove dead copper, pour order 1010): 72.8,53.6 78.8,53.6 78.8,43 72.8,43 72.8,53.6
-5.5V1 on Top Layer "Top Layer-No Net 1" (hatched Horizontal grid 0.18 track 0.2, remove dead copper, pour order 1009): 39.06,52.3 66.46,52.3 66.46,46.9 39.06,46.9 39.06,52.3
-5.5V2 on Top Layer "Top Layer-No Net 1" (hatched Horizontal grid 0.18 track 0.2, remove dead copper, pour order 1008): 79.7,52.3 107.1,52.3 107.1,46.9 79.7,46.9 79.7,52.3
GND on Top Layer "Top Layer-No Net 1" (hatched Horizontal grid 0.18 track 0.2, remove dead copper, pour order 1007): 93.3,71.6 99.3,71.6 99.3,61 93.3,61 93.3,71.6
+2.3V3 on Top Layer "Top Layer-No Net 1" (hatched Horizontal grid 0.18 track 0.2, remove dead copper, pour order 1006): 92.7,61 86.1,61 86.1,62.2 80,62.2 80,67.5 86.1,67.5 86.1,71.6 92.7,71.6 92.7,61
GND on Top Layer "Top Layer-No Net 1" (hatched Horizontal grid 0.18 track 0.2, remove dead copper, pour order 1005): 72.8,71.6 78.8,71.6 78.8,61 72.8,61 72.8,71.6
+2.3V2 on Top Layer "Top Layer-No Net 1" (hatched Horizontal grid 0.18 track 0.2, remove dead copper, pour order 1004): 72.2,61 65.6,61 65.6,62.2 59.5,62.2 59.5,67.5 65.6,67.5 65.6,71.6 72.2,71.6 72.2,61
+2.3V1 on Top Layer "Top Layer-No Net 1" (hatched Horizontal grid 0.18 track 0.2, remove dead copper, pour order 1003): 51.7,61 45.1,61 45.1,62.2 39,62.2 39,67.5 45.1,67.5 45.1,71.6 51.7,71.6 51.7,61
GND on Top Layer "Top Layer-No Net 1" (hatched Horizontal grid 0.18 track 0.2, remove dead copper, pour order 1002): 52.3,71.6 58.3,71.6 58.3,61 52.3,61 52.3,71.6
+5.5V on Top Layer "Top Layer-No Net 1" (hatched Horizontal grid 0.18 track 0.2, remove dead copper, pour order 1001): 12.5,54.52 12.5,59.92 107.1,59.92 107.1,54.52 12.5,54.52
+3.3V on Top Layer "Top Layer-No Net 1" (hatched Horizontal grid 0.18 track 0.2, remove dead copper, pour order 1000): 12.5,72.3 12.5,77.7 107.1,77.7 107.1,72.3 12.5,72.3
GND on Bottom Layer "Top Layer-No Net 1" (hatched Horizontal grid 0.18 track 0.2, remove dead copper, pour order 1032): 12.5,117.3 25.3,117.3 32,110.6 107.1,110.6 107.1,78.8 106.7,78.4 12.5,78.4 12.5,117.3
-5.5V2 on Bottom Layer "Top Layer-No Net 1" (hatched Horizontal grid 0.18 track 0.2, remove dead copper, pour order 1031): 107.1,52.3 110.8,52.3 113.4,49.7 117,49.7 119.2,47.5 126,47.5 126,41.7 117,41.7 116.6,42.1 114,44.7 112.8,44.7 109.3,44.7 108.9,45.1 107.1,46.9 107.1,52.3
+5.5V on Bottom Layer "Top Layer-No Net 1" (hatched Horizontal grid 0.18 track 0.2, remove dead copper, pour order 1030): 107.1,59.92 117.08,59.92 118.5,58.5 126,58.5 126,52.7 117,52.7 116.8,52.9 115.18,54.52 107.1,54.52 107.1,59.92
+2.3V4 on Bottom Layer "Top Layer-No Net 1" (hatched Horizontal grid 0.18 track 0.2, remove dead copper, pour order 1029): 100,67.5 107.1,67.5 109.1,69.5 117,69.5 126,69.5 126,63.7 112.7,63.7 111.2,62.2 104.4,62.2 100,62.2 100,67.5
+3.3V on Bottom Layer "Top Layer-No Net 1" (hatched Horizontal grid 0.18 track 0.2, remove dead copper, pour order 1028): 107.1,72.3 112,72.3 112.7,73 117,73 117.4,73.4 118.7,74.7 122.5,74.7 126,74.7 126,80.5 117,80.5 109.9,80.5 107.1,77.7 107.1,72.3
-5.5V1 on Bottom Layer "Top Layer-No Net 1" (hatched Horizontal grid 0.18 track 0.2, remove dead copper, pour order 1027): 65.6,53.6 72.2,53.6 72.2,43 65.6,43 65.6,53.6
GND on Bottom Layer "Top Layer-No Net 1" (hatched Horizontal grid 0.18 track 0.2, remove dead copper, pour order 1026): 72.8,43 72.8,53.6 78.8,53.6 78.8,43 72.8,43
-5.5V1 on Bottom Layer "Top Layer-No Net 1" (hatched Horizontal grid 0.18 track 0.2, remove dead copper, pour order 1025): 39.06,52.3 66.46,52.3 66.46,46.9 39.06,46.9 39.06,52.3
-5.5V2 on Bottom Layer "Top Layer-No Net 1" (hatched Horizontal grid 0.18 track 0.2, remove dead copper, pour order 1024): 79.7,52.3 107.1,52.3 107.1,46.9 79.7,46.9 79.7,52.3
+2.3V3 on Bottom Layer "Top Layer-No Net 1" (hatched Horizontal grid 0.18 track 0.2, remove dead copper, pour order 1023): 92.7,61 86.1,61 86.1,62.2 80,62.2 80,67.5 86.1,67.5 86.1,71.6 92.7,71.6 92.7,61
GND on Bottom Layer "Top Layer-No Net 1" (hatched Horizontal grid 0.18 track 0.2, remove dead copper, pour order 1022): 93.3,61 93.3,71.6 99.3,71.6 99.3,61 93.3,61
+2.3V2 on Bottom Layer "Top Layer-No Net 1" (hatched Horizontal grid 0.18 track 0.2, remove dead copper, pour order 1021): 72.2,61 65.6,61 65.6,62.2 59.5,62.2 59.5,67.5 65.6,67.5 65.6,71.6 72.2,71.6 72.2,61
GND on Bottom Layer "Top Layer-No Net 1" (hatched Horizontal grid 0.18 track 0.2, remove dead copper, pour order 1020): 72.8,61 72.8,71.6 78.8,71.6 78.8,61 72.8,61
GND on Bottom Layer "Top Layer-No Net 1" (hatched Horizontal grid 0.18 track 0.2, remove dead copper, pour order 1019): 52.3,61 52.3,71.6 58.3,71.6 58.3,61 52.3,61
+2.3V1 on Bottom Layer "Top Layer-No Net 1" (hatched Horizontal grid 0.18 track 0.2, remove dead copper, pour order 1018): 51.7,61 45.1,61 45.1,62.2 39,62.2 39,67.5 45.1,67.5 45.1,71.6 51.7,71.6 51.7,61
+5.5V on Bottom Layer "Top Layer-No Net 1" (hatched Horizontal grid 0.18 track 0.2, remove dead copper, pour order 1017): 12.5,54.52 12.5,59.92 107.1,59.92 107.1,54.52 12.5,54.52
+3.3V on Bottom Layer "Top Layer-No Net 1" (hatched Horizontal grid 0.18 track 0.2, remove dead copper, pour order 1016): 12.5,72.3 12.5,77.7 107.1,77.7 107.1,72.3 12.5,72.3
GND on Bottom Layer "Top Layer-No Net 1" (hatched Horizontal grid 0.18 track 0.2, remove dead copper, pour order 1000): 12.5,47 38.4,47 38.4,46.3 38.4,46.2 39.1,46.2 64.9,46.2 64.9,45.3 64.9,42.3 66.4,42.3 79.5,42.3 79.5,42.7 79.5,46.2 80.3,46.2 106.7,46.2 107.1,45.8 107.1,33.5 106.4,33.5 12.5,33.5 12.5,34 12.5,47
-5.5V2 on Mid-Layer 1 "Top Layer-No Net 1" (hatched Horizontal grid 0.18 track 0.2, remove dead copper, pour order 1015): 107.1,52.3 110.8,52.3 110.9,52.2 113.4,49.7 114.8,49.7 117,49.7 119.1,47.6 119.2,47.5 119.6,47.5 126,47.5 126,41.7 117,41.7 114,44.7 112.5,44.7 109.3,44.7 109,45 107.1,46.9 107.1,52.3
+5.5V on Mid-Layer 1 "Top Layer-No Net 1" (hatched Horizontal grid 0.18 track 0.2, remove dead copper, pour order 1014): 107.1,59.92 117.08,59.92 117.1,59.9 118.5,58.5 120.9,58.5 126,58.5 126,52.7 117,52.7 115.18,54.52 107.1,54.52 107.1,59.92
+2.3V4 on Mid-Layer 1 "Top Layer-No Net 1" (hatched Horizontal grid 0.18 track 0.2, remove dead copper, pour order 1013): 126,63.7 112.7,63.7 111.2,62.2 100,62.2 100,67.5 107.1,67.5 109.1,69.5 126,69.5 126,63.7
+3.3V on Mid-Layer 1 "Top Layer-No Net 1" (hatched Horizontal grid 0.18 track 0.2, remove dead copper, pour order 1012): 107.1,72.3 112,72.3 112.7,73 117,73 118.7,74.7 126,74.7 126,80.5 109.9,80.5 107.1,77.7 107.1,72.3
-5.5V1 on Mid-Layer 1 "Top Layer-No Net 1" (hatched Horizontal grid 0.18 track 0.2, remove dead copper, pour order 1011): 65.6,53.6 72.2,53.6 72.2,43 65.6,43 65.6,53.6
GND on Mid-Layer 1 "Top Layer-No Net 1" (hatched Horizontal grid 0.18 track 0.2, remove dead copper, pour order 1010): 72.8,53.6 78.8,53.6 78.8,43 72.8,43 72.8,53.6
-5.5V1 on Mid-Layer 1 "Top Layer-No Net 1" (hatched Horizontal grid 0.18 track 0.2, remove dead copper, pour order 1009): 39.06,52.3 66.46,52.3 66.46,46.9 39.06,46.9 39.06,52.3
-5.5V2 on Mid-Layer 1 "Top Layer-No Net 1" (hatched Horizontal grid 0.18 track 0.2, remove dead copper, pour order 1008): 79.7,52.3 107.1,52.3 107.1,46.9 79.7,46.9 79.7,52.3
GND on Mid-Layer 1 "Top Layer-No Net 1" (hatched Horizontal grid 0.18 track 0.2, remove dead copper, pour order 1007): 93.3,71.6 99.3,71.6 99.3,61 93.3,61 93.3,71.6
+2.3V3 on Mid-Layer 1 "Top Layer-No Net 1" (hatched Horizontal grid 0.18 track 0.2, remove dead copper, pour order 1006): 92.7,61 86.1,61 86.1,62.2 80,62.2 80,67.5 86.1,67.5 86.1,71.6 92.7,71.6 92.7,61
GND on Mid-Layer 1 "Top Layer-No Net 1" (hatched Horizontal grid 0.18 track 0.2, remove dead copper, pour order 1005): 72.8,71.6 78.8,71.6 78.8,61 72.8,61 72.8,71.6
+2.3V2 on Mid-Layer 1 "Top Layer-No Net 1" (hatched Horizontal grid 0.18 track 0.2, remove dead copper, pour order 1004): 72.2,61 65.6,61 65.6,62.2 59.5,62.2 59.5,67.5 65.6,67.5 65.6,71.6 72.2,71.6 72.2,61
+2.3V1 on Mid-Layer 1 "Top Layer-No Net 1" (hatched Horizontal grid 0.18 track 0.2, remove dead copper, pour order 1003): 51.7,61 45.1,61 45.1,62.2 39,62.2 39,67.5 45.1,67.5 45.1,71.6 51.7,71.6 51.7,61
GND on Mid-Layer 1 "Top Layer-No Net 1" (hatched Horizontal grid 0.18 track 0.2, remove dead copper, pour order 1002): 52.3,71.6 58.3,71.6 58.3,61 52.3,61 52.3,71.6
+5.5V on Mid-Layer 1 "Top Layer-No Net 1" (hatched Horizontal grid 0.18 track 0.2, remove dead copper, pour order 1001): 12.5,54.52 12.5,59.92 107.1,59.92 107.1,54.52 12.5,54.52
+3.3V on Mid-Layer 1 "Top Layer-No Net 1" (hatched Horizontal grid 0.18 track 0.2, remove dead copper, pour order 1000): 12.5,72.3 12.5,77.7 107.1,77.7 107.1,72.3 12.5,72.3
GND on Internal Plane 1 (split plane): 129.49,10.51 10.51,10.51 10.51,139.49 129.49,139.49

## Other copper
Bottom Layer:
  text "Demart 2" at 128.375,131 h1.8
  text "BackPlane4 v1.0" at 128.375,127.5 h1.8
  text "BINP, Talyshev" at 128.375,124 h1.8
  text "August 2014" at 128.375,120.5 h1.8
  text "12v" at 128.5,106 h1.5 r90
  text "12v" at 128.5,95 h1.5 r90
  text "3.3v" at 128.5,80.5 h1.5 r90
  text "2.3v" at 128.5,69.5 h1.5 r90
  text "+5.5v" at 128.5,59.5 h1.5 r90
  text "-5.5v" at 128.5,48 h1.5 r90

## Silkscreen, mask and mechanical layers (free items; w line width, h text height)
Top Solder:
  circle w2: c87.45,124.3 r1
  circle w2: c98.85,124.3 r1
  circle w2: c67.15,124.3 r1
  circle w2: c78.55,124.3 r1
  circle w2: c46.85,124.3 r1
  circle w2: c58.25,124.3 r1
  circle w2: c37.85,124.3 r1
  circle w2: c26.45,124.3 r1
  lines w1: 10,10 130,10 130,140 10,140 10,10
Bottom Solder:
  circle w2.5: c17.62,120 r1.25
  circle w2.5: c43.02,120 r1.25
  circle w2.5: c63.34,120 r1.25
  circle w2.5: c83.66,120 r1.25
  circle w2.5: c103.98,120 r1.25
  circle w2.5: c103.98,30 r1.25
  circle w2.5: c83.66,30 r1.25
  circle w2.5: c63.34,30 r1.25
  circle w2.5: c43.02,30 r1.25
  circle w2.5: c17.62,30 r1.25
  circle w2.5: c17.62,13.75 r1.25
  circle w2.5: c43.02,13.75 r1.25
  circle w2.5: c63.34,13.75 r1.25
  circle w2.5: c83.66,13.75 r1.25
  circle w2.5: c103.98,13.75 r1.25
  circle w2.5: c103.98,136.25 r1.25
  circle w2.5: c83.66,136.25 r1.25
  circle w2.5: c63.34,136.25 r1.25
  circle w2.5: c43.02,136.25 r1.25
  circle w2.5: c17.62,136.25 r1.25
  circle w2.5: c124.3,136.25 r1.25
  circle w2.5: c124.3,13.75 r1.25
  lines w1: 10,10 130,10 130,140 10,140 10,10
Mechanical 2:
  the board outline again, w0.1
Mechanical 3:
  lines w0.1: 15,13.75 125,13.75 ; 15,30 125,30 ; 15,120 125,120 ; 15,136.25 125,136.25 ; 17.62,12.5 17.62,17.5 ; 17.62,27.5 17.62,32.5 ; 17.62,117.5 17.62,122.5 ; 17.62,132.5 17.62,137.5 ; 29.35,79 29.35,115 ; 43.02,12.5 43.02,17.5 ; 43.02,27.5 43.02,32.5 ; 43.02,117.5 43.02,122.5 ; 43.02,132.5 43.02,137.5 ; 52.21,79 52.21,115 ; 63.34,12.5 63.34,17.5 ; 63.34,27.5 63.34,32.5 ; 63.34,117.5 63.34,122.5 ; 63.34,132.5 63.34,137.5 ; 72.53,79 72.53,115 ; 83.66,12.5 83.66,17.5 ; 83.66,27.5 83.66,32.5 ; 83.66,117.5 83.66,122.5 ; 83.66,132.5 83.66,137.5 ; 92.85,79 92.85,115 ; 103.98,12.5 103.98,17.5 ; 103.98,27.5 103.98,32.5 ; 103.98,117.5 103.98,122.5 ; 103.98,132.5 103.98,137.5 ; 124.3,12.5 124.3,17.5 ; 124.3,132.5 124.3,137.5